# Altium PCB 音频带10W功放.pcbdoc
Units mm, origin at the board's own origin, x right, y up, seen from the top; angles counter-clockwise.
Board outline 144.9 x 109.39 mm, 2 copper layers (Top Layer, Bottom Layer); 103 components, 128 nets, 348 pads, 101 vias.
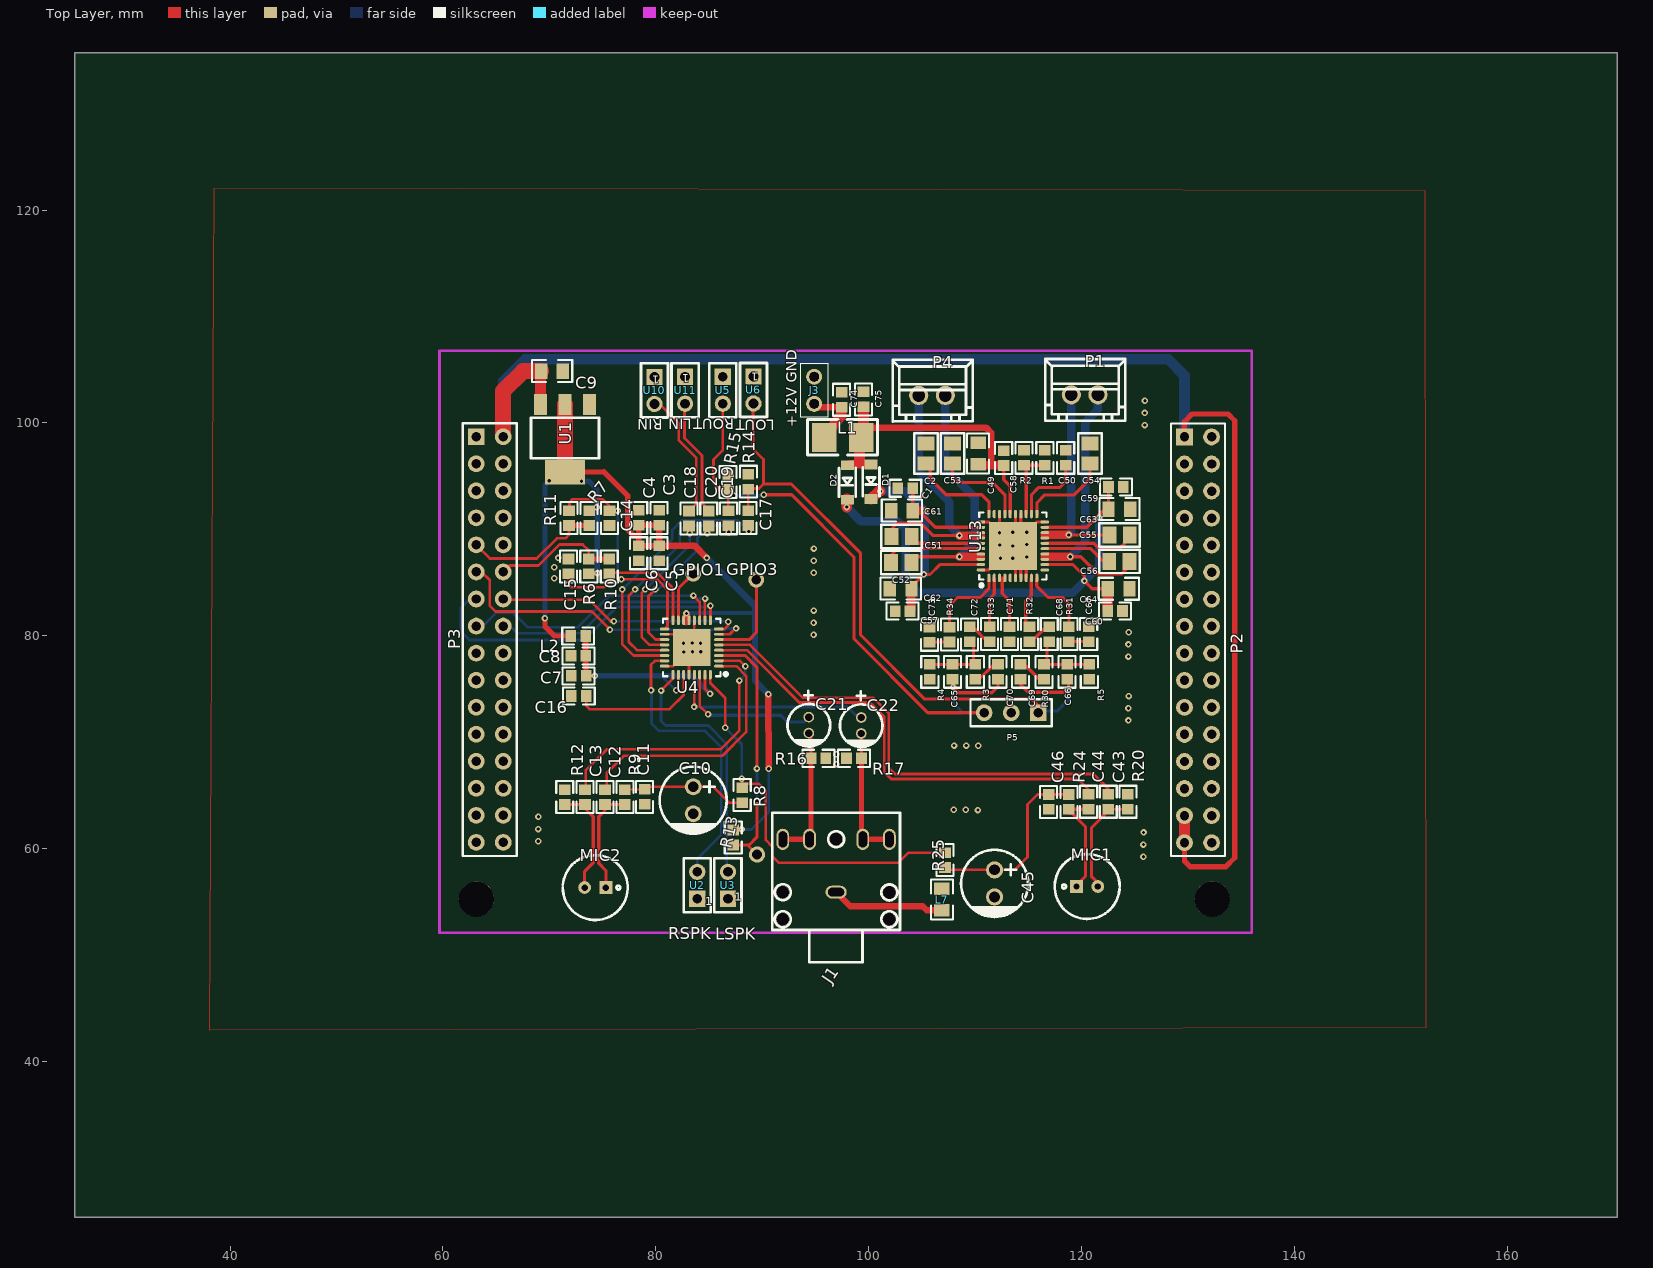
[diagram p0: Top Layer view]
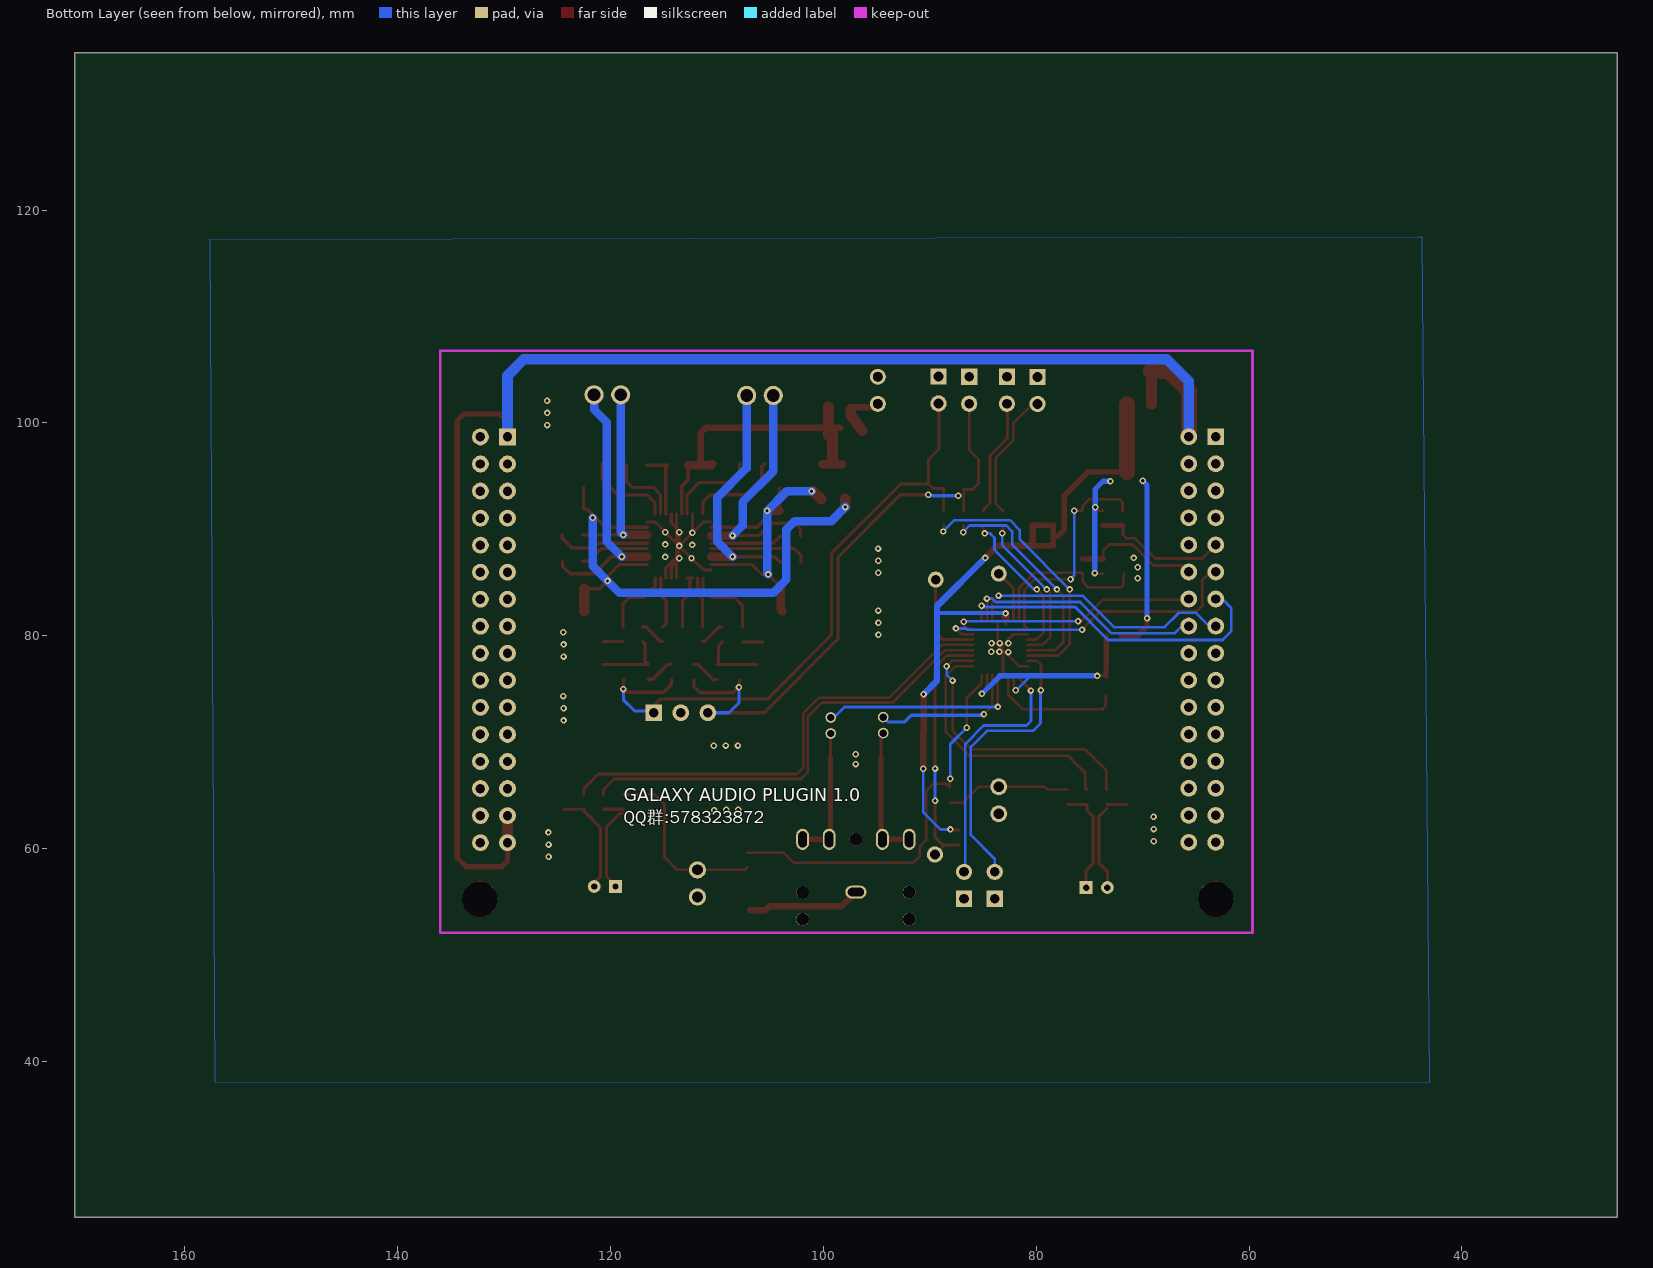
[diagram p1: Bottom Layer view, seen from below]

## Layer stack, top to bottom
Top Layer: signal copper (thickness not stored)
Dielectric: dielectric 0.32, FR-4, Dk 4.8
Bottom Layer: signal copper (thickness not stored)

## Board outline
170.3,25.4 25.4,25.4 25.4,134.787 170.3,134.787

## Components (designator, comment, footprint, x,y, rotation, side; value= is the part's Value field where it differs from the comment)
C1 "100nF" 0603 103.42,93.867 r180 top
C2 "1uF" C0805 105.38,97.127 r270 top
C3 "10uF" 0603 80.3,91.087 r270 top
C4 "100nF" 0603 78.38,91.087 r90 top
C5 "10uF" 0603 80.3,87.767 r90 top
C6 "100nF" 0603 78.38,87.767 r270 top
C7 "10uF" 0603 72.74,76.247 r0 top
C8 "100nF" 0603 72.72,78.127 r180 top
C9 "10uF" 0805 70.244,104.867 r180 top
C10 "47uF" CAP-TH_BD6.3-P2.50-D1.0-L-FD 83.5,64.567 r270 top
C11 "100nF" 0603 78.94,64.887 r270 top
C12 "1uF" 0603 75.22,64.866 r270 top
C13 "1uF" 0603 73.34,64.866 r270 top
C14 "33pF" 0603 75.64,91.067 r90 top
C15 "33pF" 0603 71.78,86.527 r270 top
C16 "4.7uF" 0603 72.76,74.367 r0 top
C17 "1uF" 0603 88.66,91.067 r90 top
C18 "1uF" 0603 83.1,91.027 r90 top
C19 "1uF" 0603 86.82,91.047 r90 top
C20 "1uF" 0603 84.96,91.027 r90 top
C21 "22uF" CAP-D4.0XF1.5 94.36,71.627 r0 top
C22 "22uF" CAP-D4.0XF1.5 99.28,71.587 r0 top
C43 "1uF" 0603 122.48,64.427 r270 top
C44 "1uF" 0603 120.62,64.427 r270 top
C45 "47uF" CAP-TH_BD6.3-P2.50-D1.0-L-FD 111.8,56.757 r270 top
C46 "100nF" 0603 116.88,64.407 r270 top
C49 "10uF" 0805 110.26,97.127 r270 top
C50 "220pF" 0603 118.48,96.727 r90 top
C51 "1uF" C0805 103.07,89.347 r180 top
C52 "1uF" C0805 103.04,86.887 r0 top
C53 "1uF" C0805 107.86,97.127 r270 top
C54 "1uF" C0805 120.76,97.127 r270 top
C55 "1uF" C0805 123.55,89.487 r0 top
C56 "1uF" C0805 123.53,87.007 r180 top
C57 "100nF" 0603 103.16,82.327 r180 top
C58 "100nF" 0603 112.66,96.707 r270 top
C59 "100nF" 0603 123.2,93.987 r180 top
C60 "100nF" 0603 123.12,82.347 r180 top
C61 "4.7uF" 0805 103.104,91.767 r0 top
C62 "4.7uF" 0805 102.98,84.447 r180 top
C63 "4.7uF" 0805 123.524,91.907 r180 top
C64 "4.7uF" 0805 123.464,84.427 r180 top
C65 "10uF" 0603 107.857,76.627 r90 top
C66 "10uF" 0603 118.62,76.627 r90 top
C67 "1uF" 0603 120.64,80.167 r270 top
C68 "1uF" 0603 116.94,80.167 r90 top
C69 "1uF" 0603 114.24,76.627 r90 top
C70 "1uF" 0603 112.131,76.627 r90 top
C71 "1uF" 0603 113.2,80.167 r90 top
C72 "1uF" 0603 109.46,80.147 r90 top
C73 "1uF" 0603 105.7,80.107 r270 top
C74 "100nF" 0603 97.44,102.177 r270 top
C75 "100nF" 0603 99.5,102.217 r270 top
D1 "1N5819HW-7-F" SOD-123 100.2,94.477 r90 top
D2 "1N5819HW-7-F" SOD-123 97.98,94.417 r90 top
GPIO1 "焊盘" 焊盘 83.5,85.847 r0 top
GPIO3 "焊盘" 焊盘 89.42,85.287 r0 top
J1 "PJ-307C" AUDIO-PJ307C 96.92,57.147 r180 top
J3 "2Pin" "2P  2.54MM" 94.86,103.067 r90 top
L1 "10uH" 1210 97.54,98.637 r0 top
L2 "0Ω" 0603 72.7,79.987 r0 top
L7 "100Ω" 0805 106.86,55.243 r270 top
MIC1 "GMI6050P-42DB" MIC-R6.0-2P-2.0PITCH 120.5,56.467 r0 top
MIC2 "GMI6050P-42DB" MIC-R6.0-2P-2.0PITCH 74.3,56.367 r180 top
P1 "XH-2A" XH-2A 120.26,102.647 r0 top
P2 "Header-Female-2.54_2x16" HDR-16X2/2.54 132.18,78.367 r270 top
P3 "Header-Female-2.54_2x16" HDR-16X2/2.54 65.66,78.387 r270 top
P4 "XH-2A" XH-2A 105.929,102.587 r0 top
P5 "Header-Male-2.54_1x3" HDR-3X1/2.54 113.36,72.787 r180 top
R1 "240KΩ" 0603 116.52,96.727 r90 top
R2 "240KΩ" 0603 114.56,96.727 r90 top
R3 "10KΩ(1002)" 0603 109.994,76.627 r270 top
R4 "10KΩ(1002)" 0603 105.72,76.627 r90 top
R5 "10KΩ(1002)" 0603 120.7,76.627 r270 top
R6 "4.7K" 0603 73.696,86.527 r270 top
R7 "4.7K" 0603 73.724,91.067 r90 top
R8 "680" 0603 88.1,65.047 r270 top
R9 "2.2K" 0603 77.08,64.866 r270 top
R10 "33" 0603 75.612,86.527 r270 top
R11 "33" 0603 71.84,91.067 r90 top
R12 "2.2K" 0603 71.44,64.867 r90 top
R13 "100K" 0603 87.26,61.067 r90 top
R14 "10K" 0603 88.68,94.486 r270 top
R15 "10K" 0603 86.78,94.447 r270 top
R16 "10K" 0603 95.26,68.507 r180 top
R17 "10K" 0603 98.6,68.507 r0 top
R20 "2.2K" 0603 124.32,64.427 r90 top
R24 "2.2K" 0603 118.78,64.407 r270 top
R25 "680" 0603 107.14,58.947 r270 top
R30 "10KΩ(1002)" 0603 116.44,76.627 r270 top
R31 "4.7KΩ(472)" 0603 118.78,80.167 r90 top
R32 "4.7KΩ(472)" 0603 115.08,80.167 r90 top
R33 "4.7KΩ(472)" 0603 111.34,80.167 r90 top
R34 "4.7KΩ(472)" 0603 107.58,80.127 r90 top
U1 "AMS1117-3.3" SOT-223 71.46,98.567 r270 top
U2 "RSPK" 2PIN 83.88,55.307 r180 top
U3 "LSPK" 2PIN 86.76,55.307 r180 top
U4 "NAU88C22YG" QFN-32_5X5X05P 83.36,78.907 r180 top
U5 "AUX-1" 2PIN 86.28,104.347 r0 top
U6 "AUX-2" 2PIN 89.16,104.367 r0 top
U10 "AUX-2" 2PIN 79.86,104.327 r0 top
U11 "AUX-1" 2PIN 82.74,104.347 r0 top
U13 "PAM8610TR" QFN-40_6X6X05P 113.52,88.447 r90 top

## Footprints (in the part's own frame and the unit in brackets; to place one, negate y for a bottom-side part, rotate by r counter-clockwise, add the part's x,y. Pads: shape width x height; smd on the part's side, far side on the other; paste and mask are expansions set on the pad)
"2P  2.54MM" [mm]
  round 1.5 hole 0.9 slot 0.9 at 0 deg: 1(-1.27,0) 2(1.27,0)
  silkscreen extent -2.54,-1.27 2.54,1.27
2PIN [mil]
  rect 60x60 hole 36: 1(0,0)
  round 60 hole 36: 2(0,-100)
  silkscreen extent -50,-150 50,50
0603 [mm]
  rect 1x1.1 smd: 1(-0.7,0) 2(0.7,0)
  silkscreen extent -1.5,-0.8 1.5,0.8
0805 [mm]
  rect 1.16x1.45 smd: 1(-1.016,0) 2(1.016,0)
  silkscreen extent -1.9,-1.03 1.87,1.04
1210 [mil]
  rect 90.56x106.3 smd: 1(-68,0) 2(68,0)
  silkscreen extent -130,-65 129,66
AUDIO-PJ307C [mm]
  round 1.2 hole 1.2: 0(-5,3.759) 0(-5,1.245) 0(0,-3.759) 0(5,3.759) 0(5,1.219)
  oval 2x1.2 hole 0.8 slot 1.5 at 0 deg: 1(0,1.205)
  oval 1.2x2 hole 0.8 slot 1.5 at 90 deg: 2(5.004,-3.748) 3(2.489,-3.748) 4(-2.511,-3.748) 5(-5.004,-3.748)
  silkscreen extent -6.01,-6.24 5.99,7.78
C0805 [mil]
  rect 51.2x63 smd: 1(-37.4,0) 2(37.4,0)
  silkscreen extent -75,-43 75,43
CAP-D4.0XF1.5 [mm]
  round 1 hole 0.7: 1(0,0.751) 2(0,-0.751)
  silkscreen extent -2,-2.02 2,3.23
CAP-TH_BD6.3-P2.50-D1.0-L-FD [mm]
  round 1.6 hole 1: 1(-1.27,0) 2(1.27,0)
  silkscreen extent -3.15,-3.15 3.17,3.15
HDR-3X1/2.54 [mil]
  rect 62x62 hole 35: 1(-100,0)
  round 62 hole 35: 2(0,0) 3(100,0)
  silkscreen extent -150,-50 150,50
HDR-16X2/2.54 [mil]
  rect 62x62 hole 35: 1(-800,-100)
  round 62 hole 35: 2(-800,0) 3(-700,-100) 4(-700,0) 5(-600,-100) 6(-600,0) 7(-500,-100) 8(-500,0) 9(-400,-100) 10(-400,0) 11(-300,-100) 12(-300,0) 13(-200,-100) 14(-200,0) 15(-100,-100) 16(-100,0) 17(0,-100) 18(0,0) 19(100,-100) 20(100,0) 21(200,-100) 22(200,0) 23(300,-100) 24(300,0) 25(400,-100) 26(400,0) 27(500,-100) 28(500,0) 29(600,-100) 30(600,0) 31(700,-100) 32(700,0)
  silkscreen extent -850,-150 750,50
MIC-R6.0-2P-2.0PITCH [mm]
  rect 1.2x1.2 hole 0.6: 1(-1,0)
  round 1.2 hole 0.6: 2(1,0)
  silkscreen extent -3.05,-3.05 3.05,3.05
QFN-32_5X5X05P [mm]
  oval 0.896x0.28 smd: 1(-2.55,1.75) 2(-2.55,1.25) 3(-2.55,0.749) 4(-2.55,0.249) 5(-2.55,-0.249) 6(-2.55,-0.749) 7(-2.55,-1.25) 8(-2.55,-1.75) 17(2.55,-1.75) 18(2.55,-1.25) 19(2.55,-0.749) 20(2.55,-0.249) 21(2.55,0.249) 22(2.55,0.749) 23(2.55,1.25) 24(2.55,1.75)
  oval 0.28x0.896 smd: 9(-1.75,-2.55) 10(-1.25,-2.55) 11(-0.749,-2.55) 12(-0.249,-2.55) 13(0.249,-2.55) 14(0.749,-2.55) 15(1.25,-2.55) 16(1.75,-2.55) 25(1.75,2.55) 26(1.25,2.55) 27(0.749,2.55) 28(0.249,2.55) 29(-0.249,2.55) 30(-0.749,2.55) 31(-1.25,2.55) 32(-1.75,2.55)
  rect 3.5x3.5 smd: 33(0,0)
  silkscreen extent -3.35,-2.7 2.7,2.7
QFN-40_6X6X05P [mm]
  rect 4.5x4.5 smd: 0(0,0)
  oval 0.796x0.28 smd: 1(-3,2.25) 2(-3,1.75) 3(-3,1.25) 4(-3,0.75) 5(-3,0.25) 6(-3,-0.25) 7(-3,-0.75) 8(-3,-1.25) 9(-3,-1.75) 10(-3,-2.25) 21(3,-2.25) 22(3,-1.75) 23(3,-1.25) 24(3,-0.75) 25(3,-0.25) 26(3,0.25) 27(3,0.75) 28(3,1.25) 29(3,1.75) 30(3,2.25)
  oval 0.28x0.796 smd: 11(-2.25,-3) 12(-1.75,-3) 13(-1.25,-3) 14(-0.75,-3) 15(-0.25,-3) 16(0.25,-3) 17(0.75,-3) 18(1.25,-3) 19(1.75,-3) 20(2.25,-3) 31(2.25,3) 32(1.75,3) 33(1.25,3) 34(0.75,3) 35(0.25,3) 36(-0.25,3) 37(-0.75,3) 38(-1.25,3) 39(-1.75,3) 40(-2.25,3)
  silkscreen extent -3.85,-3.15 3.15,3.15
SOD-123 [mil]
  rect 35.8x48 smd: 1(64,0) 2(-64,0)
  silkscreen extent -53,-31 53,31
SOT-223 [mm]
  rect 2x1.2 smd: 1(-3.175,2.3) 2(-3.175,0) 3(-3.175,-2.3)
  rect 2.3x3.8 smd: 4(3.175,0)
  silkscreen extent -1.93,-3.2 1.87,3.2
XH-2A [mm]
  round 1.8 hole 1.199: 1(-1.251,0) 2(1.251,0)
  silkscreen extent -3.69,-2.45 3.83,3.35
焊盘 [mm]
  round 1.5 hole 0.9: 1(0,0)

## Free pads (board coordinates)
  round 1.524 hole 0.914: 1(89.5,59.467)
  round 3.302 hole 3.302 unplated: ""(63.13,55.276) ""(132.24,55.276)

## Via types
v1: diameter 0.61, hole 0.305, Top Layer to Bottom Layer, 101 vias

## Nets (pads, with @x,y where several pads share a name; then routed paths per layer and width w, separated by ;. In a path a pad name is that pad's centre, name@x,y a point inside that pad or via, vN(x,y) a via of type N, cw(c..) or ccw(c..) an arc to the next point about the centre after c; other vN are vias at no path point)
3.3V: P2.3 P3.4
+5V: C9.2 P2.1 P2.29 P2.31 P3.2 U1.3 | length 145.6
  Top Layer w0.5: P2.31 129.64,58.847 130.16,58.327 133.52,58.327 134.36,59.167 134.36,100.207 133.72,100.847 130.36,100.847 129.62,100.107 129.62,98.707 P2.1
  Top Layer w1: U1.3 69.16,104.799 C9.2 ; P2.31 P2.29
  Top Layer w1.5: P3.2 65.659,103.007 67.521,104.866 C9.2
  Bottom Layer w1: P3.2 65.659,103.927 67.719,105.987 128.1,105.987 129.639,104.447 P2.1
+12V: C74.2 J3.1 L1.1 | length 5.1
  Top Layer w0.6: J3.1 95.18,101.477 C74.2
  Top Layer w1: L1.1@96.325,99.282 97.42,100.771 C74.2@97.42,101.301
AUXOUT1: C19.1 U4.21 | length 21.7
  Top Layer w0.25: v1(78.04,84.367) 77.46,83.787 77.46,79.407 78.2,78.667 U4.21 ; C19.1@86.821,90.345 v1(86.841,89.746)
  Bottom Layer w0.254: v1(78.04,84.367) 82.241,88.567 82.241,89.827 82.779,90.366 86.239,90.366 v1(86.841,89.746)
AUXOUT2: C17.1 U4.22 | length 25.7
  Top Layer w0.25: v1(76.84,84.367) 76.84,79.207 77.888,78.158 U4.22 ; C17.1 88.66,89.867 v1(88.72,89.807)
  Bottom Layer w0.25: v1(76.84,84.367) 81.54,89.086 81.54,89.947 82.459,90.866 87.659,90.866 v1(88.72,89.807)
AVCC12: C49.2 C58.2 C75.2 D1.1 D2.1 L1.2 U13.26 | length 31.4
  Top Layer w0.3: C58.2 112.66,94.677 113.27,94.067 U13.26
  Top Layer w0.6: L1.2@98.4,99.567 111,99.567 111.5,99.067 111.5,96.11 ; L1.2@99.5,99.397 L1.2@99.62,99.517
  Top Layer w0.8: D2.1@98.18,96.137 D1.1@100.04,96.137 ; C49.2@110.42,96.113 110.526,96.007 C58.2
  Top Layer w1: 99.12,96.497 99.119,99.015 L1.2@99.5,99.396 ; L1.2@99.267,98.637 99.5,98.87 C75.2
AVDD: C71.2 U13.3 U13.4 | length 5.4
  Top Layer w0.3: U13.3 U13.4 ; 112.519,85.446 112.519,83.988 113.2,83.307 C71.2
C2_2: C2.2 U13.30 | length 9.1
  Top Layer w0.3: C2.2@105.483,96.177 105.76,95.9 105.76,94.767 107.259,93.266 110.599,93.266 111.27,92.596 U13.30
C11_1: C10.1 C11.1 R8.2 R9.1 | length 11.7
  Top Layer w0.25: R9.1 C11.1@78.939,65.585 ; C11.1 79.19,65.837 C10.1@83.22,65.837 ; C10.1@83.219,65.837 85.37,65.837 86.859,64.346 R8.2
C13_2: C13.2 MIC2.2 R12.1 | length 10
  Top Layer w0.3: R12.1 C13.2 ; MIC2.2 73.3,57.887 74.121,58.707 74.121,63.01 C13.2@73.341,63.79
C21_2: C21.2 J1.2 J1.3 R16.2 | length 12.6
  Top Layer w0.3: C21.2 94.56,70.676 R16.2
  Top Layer w0.5: J1.2 J1.3 94.56,61.024 R16.2
C22_2: C22.2 J1.4 J1.5 R17.2 | length 12.9
  Top Layer w0.3: C22.2 99.3,70.816 R17.2 ; R17.2@99.299,68.054 99.319,67.686
  Top Layer w0.5: R17.2 99.3,61.026 J1.4 J1.5
C44_2: C44.2 MIC1.1 R24.2 | length 9.9
  Top Layer w0.3: R24.2@118.779,63.327 119.079,63.327 120.341,62.068 120.341,57.447 119.5,56.607 MIC1.1 ; R24.2 118.8,63.727 C44.2
C50_1: C50.1 U13.22 | length 7.1
  Top Layer w0.3: U13.22 115.27,93.276 115.92,93.927 117.899,93.927 118.481,94.506 C50.1
C51_1: C51.1 U13.35 | length 6.8
  Top Layer w0.3: C51.1 104.67,88.697 U13.35
C52_1: C52.1 U13.36 | length 9.4
  Top Layer w0.3: C52.1 102.09,87.597 102.689,88.196 U13.36
C53_2: C53.2 U13.27 | length 8.8
  Top Layer w0.3: C53.2@107.841,96.246 107.841,94.887 108.321,94.407 111.64,94.407 112.771,93.276 U13.27
C54_2: C54.2 U13.21 | length 8.4
  Top Layer w0.3: U13.21 115.801,91.476 115.801,92.527 116.52,93.246 119.301,93.246 120.759,94.706 C54.2
C55_2: C55.2 U13.16 | length 8.9
  Top Layer w0.3: U13.16 121.099,88.707 121.539,88.268 123.599,88.268 124.5,89.167 C55.2
C56_2: C56.2 U13.15 | length 6.6
  Top Layer w0.3: U13.15 120.83,88.197 122.02,87.007 C56.2
GND: C1.2 C2.1 C3.1 C4.2 C5.1 C6.2 C7.1 C8.2 C9.1 C10.2 C11.2 C14.1 C15.1 C16.1 C45.2 C46.2 C49.1 C50.2 C53.1 C54.1 C57.2 C58.1 C59.1 C60.1 C61.1 C62.2 C63.1 C64.1 C67.1 C71.1 C73.1 C74.1 C75.1 J3.2 L7.1 P2.2 P2.4 P2.32 P3.1 P3.31 P5.2 R1.2 R2.2 R4.1 R5.2 R12.2 R14.1 R15.1 R16.1 R17.1 R20.2 U1.1 U2.1 U3.1 U4.12 U4.18 U4.24 U4.28 U4.33 U5.1 U6.1 U10.1 U11.1 U13.0 U13.6 U13.7 U13.8 U13.11 U13.20 U13.24 U13.25 U13.28 U13.31 U13.40 | length 43.3
  Top Layer w0.25: U4.24 81.61,77.157 U4.33 ; U4.18 82.11,80.156 U4.33 ; U4.28 83.111,78.658 U4.33 ; U4.12 83.609,79.156 U4.33
  Top Layer w0.3: U13.40 111.27,86.197 v1(112.36,87.287) U13.0 ; U13.31 111.27,90.697 U13.0 ; U13.28 v1(112.27,89.697) U13.0 ; U13.6 113.77,88.197 U13.0 ; U13.25 113.77,88.697 U13.0 ; U13.7 114.269,86.538 v1(113.52,87.287) U13.0 ; U13.24 114.269,90.617 113.52,89.868 v1(113.52,89.727) U13.0 ; U13.8 114.77,86.378 113.52,87.627 U13.0 ; U13.20 115.77,90.697 v1(114.82,89.747) U13.0
  other v1: 125.78,59.267 125.78,60.407 68.94,60.727 125.8,61.546 68.94,61.867 68.96,63.006 110.24,63.647 107.96,63.667 109.1,63.667 96.94,67.967 96.94,68.887 108,69.707 109.14,69.707 110.28,69.687 124.38,72.067 124.38,73.206 124.4,74.346 124.38,78.067 82.62,78.486 83.44,78.507 84.22,78.507 124.38,79.206 82.6,79.306 84.18,79.306 83.42,79.326 94.8,80.107 124.4,80.347 94.8,81.246 94.82,82.387 70.44,85.427 94.82,85.927 70.46,86.447 94.82,87.067 70.82,87.326 114.83,87.417 94.84,88.207 113.52,88.447 112.28,88.547 114.83,88.597 125.9,99.806 125.9,100.946 125.92,102.086
GPIO1: GPIO1.1 U4.15 | length 5
  Top Layer w0.3: U4.15 82.11,84.457 GPIO1.1
GPIO2: pad.1 R13.1 U4.3 | length 23.9
  Top Layer w0.254: 88.475,60.367 88.6,60.367 pad.1
  Top Layer w0.3: U4.3 88.389,78.157 89.48,77.067 v1(89.48,67.546) ; R13.1 88.74,60.348 89.479,61.087 v1(89.48,64.527)
  Bottom Layer w0.3: v1(89.48,64.527) 89.48,64.539 v1(89.48,64.527) v1(89.48,67.546)
GPIO3: GPIO3.1 U4.6 | length 8.7
  Top Layer w0.3: U4.6 88.769,79.657 89.44,80.328 GPIO3.1@89.44,85.207
I2S_BCLK: P3.14 U4.8 | length 23.4
  Top Layer w0.254: P3.14 65.721,83.406 73.699,83.406 75.721,81.387 v1(76.06,81.386) ; U4.8@85.871,80.658 86.432,80.658 86.8,81.026 v1(86.8,81.326)
  Bottom Layer w0.254: v1(76.06,81.386) 86.74,81.387 v1(86.8,81.326)
I2S_DI: P3.13 U4.9 | length 30.5
  Top Layer w0.25: U4.9 85.12,81.467 v1(85.12,82.827)
  Bottom Layer w0.254: P3.13 62.5,83.467 61.68,82.647 61.68,80.427 62.48,79.627 73.239,79.627 76.32,82.708 84.999,82.708 v1@85.119,82.827
I2S_DO: P3.16 U4.10 | length 22.7
  Top Layer w0.25: U4.10 84.58,81.486 84.58,83.467 v1(84.62,83.507)
  Bottom Layer w0.254: P3.16 66.3,80.927 66.981,80.246 72.919,80.246 75.86,83.188 83.8,83.188 84.12,83.508 v1(84.62,83.507)
I2S_I2C_SCL: C15.2 R10.2 U4.16 | length 15.6
  Top Layer w0.254: C15.2@71.779,85.827 71.799,84.788 72.02,84.567 75.101,84.567 75.612,85.077 R10.2 75.711,85.926 80.161,85.926 81.611,84.475 U4.16
I2S_I2C_SDA: C14.2 R11.2 U4.17 | length 21.3
  Top Layer w0.25: v1(76.76,85.326) 80.08,85.327 81.08,84.327 81.08,80.927 U4.17
  Top Layer w0.254: R11.2 71.88,91.807 71.88,92.547 72.18,92.847 75,92.847 75.64,92.206 75.64,91.766 v1@76.42,91.766
  Bottom Layer w0.254: v1(76.42,91.767) 76.42,85.666 v1(76.76,85.326)
I2S_LRCK: P3.11 U4.7 | length 29.9
  Top Layer w0.254: P3.11 63.62,86.007 64.4,85.227 64.4,82.827 64.941,82.286 73.981,82.286 v1(75.68,80.587) ; U4.7 86.93,80.157 87.479,80.707 v1(87.52,80.706)
  Bottom Layer w0.254: v1(75.68,80.587) 86.46,80.587 86.58,80.707 v1(87.52,80.706)
I2S_MCLK: P3.15 U4.11 | length 25.3
  Top Layer w0.25: v1(83.52,83.786) 84.109,83.197 U4.11
  Bottom Layer w0.254: P3.15 63.74,80.927 64.979,82.167 66.6,82.167 67.941,80.825 72.678,80.825 75.639,83.787 v1(83.52,83.786)
L7_2: J1.1 L7.2 | length 10.7
  Top Layer w0.6: J1.1 98.255,54.607 105.04,54.607 105.42,54.227 L7.2
L+: C55.1 P1.1 U13.17 U13.18 | length 19.9
  Top Layer w0.3: U13.17 U13.18 ; v1(118.76,89.487) C55.1
  Top Layer w0.8: 116.52,89.461 116.546,89.487 v1(118.76,89.487)
  Bottom Layer w0.8: v1(118.76,89.487) 119.009,89.736 P1.1
L-: C56.1 P1.2 U13.13 U13.14 | length 26.2
  Top Layer w0.3: U13.13 U13.14 ; v1(118.9,87.427) 119.9,87.427 121.48,85.847 123.759,85.847 124.48,86.566 C56.1
  Top Layer w0.8: 116.52,87.422 116.789,87.427 v1(118.9,87.427)
  Bottom Layer w0.8: v1(118.9,87.427) 120.299,88.826 120.299,100.045 121.511,101.257 P1.2
L_IN: C17.2 C66.1 C69.1 P5.1 R14.2 U6.2 | length 62.4
  Top Layer w0.25: C17.2 R14.2 88.741,93.845 89.681,93.845 90.1,94.267 90.1,96.586 89.119,97.567 U6.2@89.119,102.306
  Top Layer w0.3: 90.099,94.267 92.7,94.267 99.22,87.747 99.22,80.086 105.24,74.066 115.28,74.066 115.9,73.447 P5.1 ; C69.1 114.259,75.428 114.98,74.706 118.44,74.706 v1(118.76,75.007) 118.76,75.767 118.68,75.847 C66.1@118.78,75.847
  Bottom Layer w0.3: P5.1 116.06,72.947 117.7,72.947 118.76,74.007 v1(118.76,75.007)
LAUXI: C20.2 U11.2 | length 11.5
  Top Layer w0.25: U11.2@82.68,102.327 82.68,98.567 84.319,96.927 84.319,92.466 84.961,91.826 C20.2
LAUXIN: C20.1 U4.19 | length 14.7
  Top Layer w0.25: v1(79.94,84.367) 79.3,83.727 79.3,80.327 79.97,79.657 U4.19 ; v1(84.82,89.626) 84.96,89.767 C20.1
  Bottom Layer w0.25: v1(79.94,84.367) 80.18,84.367 83.9,88.087 83.9,89.207 84.32,89.627 v1@84.96,89.627
LHP: C21.1 U4.30 | length 14
  Top Layer w0.25: U4.30 84.11,73.436 v1(84.9,72.647)
  Bottom Layer w0.3: v1(84.9,72.647) 85.001,72.547 91.719,72.547 92.339,71.928 93.901,71.928 C21.1@94.351,72.377
LSPKOUT: U3.2 U4.25 | length 23.9
  Top Layer w0.25: v1(80.48,74.866) 81.61,75.997 U4.25
  Bottom Layer w0.25: v1(80.48,74.866) 80.481,72.027 80.92,71.587 84.921,71.587 86.64,69.868 86.64,57.965 U3.2
MICBIAS: R8.1 R25.1 U4.32 | length 37.7
  Top Layer w0.25: U4.32 85.111,75.555 86.52,74.146 v1(86.52,71.367) ; v1(88.06,66.587) 88.1,66.547 R8.1 ; R8.1 88.458,66.106 89.662,66.106 90.32,65.448 90.32,60.828 90.919,60.228 90.919,59.347 91.579,58.687 102.738,58.687 103.698,59.647 R25.1
  Bottom Layer w0.25: v1(86.52,71.367) 88.06,69.826 v1(88.06,66.587)
MICN: C13.1 U4.2 | length 26.8
  Top Layer w0.25: C13.1 73.4,65.626 73.4,67.367 75.38,69.347 86.06,69.347 87.84,71.127 v1(87.84,75.807) ; U4.2 87.9,77.666 v1(88.4,77.147)
  Bottom Layer w0.25: v1(87.84,75.807) 88.4,76.367 v1(88.4,77.147)
MICP: C12.1 U4.1 | length 24.5
  Top Layer w0.25: C12.1 75.38,65.727 75.38,67.127 77,68.747 86.26,68.747 88.48,70.967 88.48,76.227 87.55,77.157 U4.1
OTH3.3V: C3.2 C4.1 C5.2 C6.1 L2.1 R6.2 R7.2 R13.2 U1.2 U1.4 U4.13 U4.14 | length 98
  Top Layer w0.25: U4.14 U4.13 ; 82.86,81.087 82.86,81.459 v1(82.86,82.106)
  Top Layer w0.254: R6.2 74.4,85.827 v1@74.48,85.907 ; R7.2@73.724,91.766 74.12,91.766 v1@74.44,92.087
  Top Layer w0.3: U4.14 82.611,81.857 v1(82.86,82.106) 83.111,81.855 U4.13 ; R13.2 v1@87.98,61.767 ; v1@87.98,61.767 v1(88.04,61.827) v1@87.98,61.767
  Top Layer w0.5: v1@69.579,81.666 69.579,80.866 70.46,79.987 L2.1 ; U1.4@71.459,95.392 75.119,95.408 77.339,93.188 77.339,89.987 77.928,89.4 78.38,89.4 ; C6.1 C5.2 ; C6.1 C4.1 ; C4.1 C3.2
  Top Layer w0.6: C3.2 C5.2 83.62,88.486 v1(84.78,87.326) ; v1@90.559,74.547 v1@90.6,67.546
  Top Layer w1.5: U1.4 U1.2
  Bottom Layer w0.25: v1(88.04,61.827) 88.96,61.827 90.6,63.466 v1(90.6,67.526)
  Bottom Layer w0.4: v1(82.86,82.106) 82.881,82.128 89.22,82.147
  Bottom Layer w0.5: v1(69.58,81.667) 69.58,94.167 v1(69.98,94.566) ; v1(73.02,94.526) 73.7,94.527 74.44,93.787 74.44,92.087 74.48,92.047 v1@74.48,85.907
  Bottom Layer w0.6: v1@84.78,87.327 89.3,82.807 89.3,75.786 v1@90.56,74.526
  other v1: 90.56,74.526 74.48,85.907 74.44,92.086
PA0: P3.9 R7.1 R11.1 | length 12.9
  Top Layer w0.254: P3.9 64.4,87.267 68.799,87.267 70.699,89.167 71.499,89.167 71.84,89.507 R11.1
  Top Layer w0.5: R11.1 R7.1
PA1: P3.12 R6.1 R10.1 | length 12
  Top Layer w0.254: P3.12 66.259,86.606 68.959,86.606 70.94,88.588 73.12,88.588 73.696,88.011 R6.1
  Top Layer w0.5: R6.1 R10.1
PA7: P3.18
PA8: P3.17
PA9: P3.20
PA10: P3.19
PA11: P3.22
PA12: P3.21
PB0: P3.32
PB1: P2.26
PB2: P2.24
PB3: P2.23
PB5: P2.25
PB7: P2.28
PB8: P2.27
PB13: P2.10
PC0: P2.30
PD8: P2.21
PD9: P2.22
PD10: P2.19
PD11: P2.20
PD12: P2.17
PD13: P2.18
PD14: P2.15
PD15: P2.16
PE10: P3.8
PE12: P3.10
PF7: P2.8
PF8: P2.7
PF9: P2.6
PF10: P2.5
PG0: P3.29
PG1: P3.30
PG3: P3.27
PG5: P3.28
PG6: P3.25
PG7: P3.26
PG8: P3.23
PG9: P3.24
PG11: P2.13
PG12: P2.14
PG13: P2.11
PG14: P2.12
PG15: P2.9
PVCCL: C59.2 C60.2 C63.2 C64.2 D2.2 U13.12 U13.19 | length 54.2
  Top Layer w0.3: U13.12 119.169,86.698 120.241,85.626 v1@120.241,85.166 ; U13.19 120.459,90.206 122.16,91.907 C63.2 122.5,91.915 C59.2 ; v1(120.24,85.167) 120.98,84.427 C64.2
  Top Layer w1: v1@97.919,92.108 D2.2@97.919,92.852 ; C60.2 122.448,82.375 C64.2
  Bottom Layer w0.8: v1@97.919,92.108 99.24,90.767 102.679,90.767 103.439,90.007 103.439,85.286 104.681,84.046 119.121,84.046 120.241,85.166 121.64,86.566 v1(121.635,91.107)
  other v1: 97.92,92.107
PVCCR: C1.1 C57.1 C61.2 C62.1 D1.2 U13.32 U13.39 | length 32.1
  Top Layer w0.3: C62.1@103.996,84.507 103.996,84.609 v1(105.159,85.772) 105.74,85.766 106.67,86.698 U13.39 ; C61.2 C1.1 ; C61.2 104.681,91.768 106.25,90.198 U13.32
  Top Layer w0.8: C57.1 103.996,82.463 C62.1 ; C61.2 v1(105.26,91.747)
  Top Layer w1: D1.2 100.936,93.587 v1(101.08,93.587)
  Bottom Layer w0.8: v1(101.08,93.587) 103.42,93.587 v1(105.26,91.747) 105.26,85.873 v1(105.159,85.772)
PVDD: U13.29
R1_1: R1.1 R2.1 U13.23 | length 6.6
  Top Layer w0.3: U13.23 114.77,95.817 R2.1 R1.1
R3_1: C65.2 C72.1 R3.1 R4.2 | length 6.6
  Top Layer w0.3: R4.2@106.23,77.307 C65.2@108.367,77.307 ; C65.2@107.856,77.307 109.994,77.307 109.819,77.48 109.819,79.085 C72.1@109.461,79.446
R3_2: C70.2 R3.2 | length 2.7
  Top Layer w0.3: R3.2@109.994,75.907 110.32,75.907 111.72,77.306 C70.2@112.131,77.306
R5_1: C66.2 C68.1 R5.1 R30.1 | length 6.6
  Top Layer w0.3: R30.1 116.741,77.627 116.741,79.266 C68.1 ; R30.1 C66.2 ; C66.2 R5.1
R9_2: C12.2 MIC2.1 R9.2 | length 10.2
  Top Layer w0.25: C12.2 R9.2
  Top Layer w0.3: C12.2 75.22,63.607 74.621,63.007 74.621,58.646 75.299,57.968 MIC2.1@75.299,56.368
R20_1: C43.2 MIC1.2 R20.1 | length 10
  Top Layer w0.25: C43.2 124.26,63.727 R20.1@124.301,63.686
  Top Layer w0.3: MIC1.2@121.499,56.467 121.499,56.807 120.92,57.386 120.92,62.007 122.48,63.566 C43.2
R24_1: C45.1 C46.1 R24.1 R25.2 | length 17.6
  Top Layer w0.25: R25.2 107.36,58.027 C45.1 113.699,58.026 114.9,59.228 114.9,64.166 115.84,65.105 C46.1@116.879,65.105 ; C46.1 R24.1
R30_2: C69.2 R30.2 | length 2.8
  Top Layer w0.3: C69.2 114.6,77.327 116,75.927 R30.2
R31_1: C67.2 R31.1 | length 1.9
  Top Layer w0.3: R31.1 C67.2
R31_2: R31.2 U13.10 | length 6.6
  Top Layer w0.3: U13.10 115.77,84.676 116.84,83.607 118.199,83.607 118.78,83.027 R31.2
R32_1: C68.2 R32.1 | length 2.4
  Top Layer w0.3: R32.1 115.26,79.467 116.66,80.867 C68.2
R32_2: R32.2 U13.9 | length 4.9
  Top Layer w0.3: R32.2 114.739,81.206 114.739,83.287 115.24,83.787 115.24,85.415 U13.9
R33_1: C72.2 R33.1 | length 2.5
  Top Layer w0.3: C72.2 109.76,80.847 111.14,79.467 R33.1
R33_2: R33.2 U13.2 | length 4.8
  Top Layer w0.3: R33.2 111.341,83.508 111.77,83.937 U13.2
R34_1: C73.2 R34.1 | length 1.9
  Top Layer w0.3: C73.2 R34.1
R34_2: R34.2 U13.1 | length 7.4
  Top Layer w0.3: R34.2 107.579,82.867 108.321,83.607 110.439,83.607 111.27,84.437 U13.1
R+: C51.2 P4.1 U13.33 U13.34 | length 25.1
  Top Layer w0.3: C51.2 102.12,90.046 102.659,90.587 104.879,90.587 106.042,89.423 v1@108.501,89.423 ; U13.34 U13.33
  Top Layer w0.8: v1(108.5,89.423) 110.52,89.424
  Bottom Layer w0.8: P4.1 104.678,95.448 107.56,92.567 107.56,90.364 v1(108.5,89.423)
R-: C52.2 P4.2 U13.37 U13.38 | length 25.4
  Top Layer w0.3: C52.2 104.53,87.427 v1(108.5,87.427) 110.218,87.427
  Top Layer w0.8: v1@108.481,87.427 110.52,87.427
  Bottom Layer w0.8: P4.2@107.18,102.588 107.18,95.766 109.939,93.007 109.939,88.867 v1@108.501,87.427
R_IN: C19.2 C65.1 C70.1 P5.3 R15.2 U5.2 | length 59.6
  Top Layer w0.25: U5.2@86.279,102.327 86.279,97.447 85.401,96.566 85.401,94.308 85.959,93.746 R15.2 86.78,91.787 C19.2
  Top Layer w0.3: R15.2@87.157,93.31 v1(87.3,93.167) ; v1(90.12,93.267) 92.74,93.266 98.6,87.406 98.6,79.725 105.539,72.786 P5.3 ; C65.1@107.857,75.907 107.857,75.23 v1(107.9,75.187) 108.42,74.666 111.539,74.666 112.131,75.258 C70.1@112.131,75.908
  Bottom Layer w0.3: v1(87.3,93.167) 90.02,93.167 v1(90.12,93.267) ; v1(107.9,75.187) 107.899,73.726 108.839,72.786 P5.3
RAUXI: C18.2 U10.2 | length 12.5
  Top Layer w0.25: U10.2@79.861,102.327 79.861,102.266 82.139,99.987 82.139,98.387 83.8,96.726 83.8,92.426 C18.2@83.099,91.727
RAUXIN: C18.1 U4.20 | length 14.8
  Top Layer w0.25: v1(79,84.367) 78.66,84.027 78.66,79.907 79.41,79.157 U4.20 ; C18.1@83.1,90.327 83.1,89.727 v1(83.18,89.646)
  Bottom Layer w0.25: v1(79,84.367) 83.18,88.547 v1(83.18,89.646)
RHP: C22.1 U4.29 | length 18.9
  Top Layer w0.25: v1(83.58,73.327) 83.61,73.357 U4.29
  Bottom Layer w0.3: v1@83.58,73.327 97.991,73.327 C22.1@98.98,72.337
RMICN: C43.1 U4.5 | length 45.7
  Top Layer w0.25: U4.5 88.831,79.157 93.782,74.206 100.401,74.206 101.879,72.728 101.879,67.607 102.461,67.025 121.099,67.025 122.479,65.646 C43.1
RMICP: C44.1 U4.4 | length 43.6
  Top Layer w0.25: U4.4 88.549,78.659 93.459,73.746 100.101,73.746 101.44,72.408 101.44,67.226 102.1,66.566 119.621,66.566 120.619,65.568 C44.1
RSPKOUT: U2.2 U4.23 | length 27.1
  Top Layer w0.25: v1(79.54,74.887) 79.54,77.307 79.89,77.657 U4.23
  Bottom Layer w0.25: v1(79.54,74.887) 79.579,74.846 79.579,71.788 80.28,71.087 84.621,71.087 86.119,69.586 86.119,61.288 83.879,59.047 U2.2@83.879,57.846
S$21: 
S$23: 
S$67: 
S$69: 
S$2331: 
SP_VD33: C7.2 C8.1 L2.2 U4.26 U4.31 | length 22.3
  Top Layer w0.25: C7.2 v1(74.26,76.246) ; v1(81.9,74.887) 82.11,75.097 U4.26 ; U4.31 84.61,75.037 v1(85.08,74.567)
  Top Layer w0.5: L2.2 73.4,78.147 C8.1@73.44,78.107 ; C8.1@73.419,78.125 C7.2
  Bottom Layer w0.25: 79.851,76.247 80.54,76.247 v1(81.9,74.887)
  Bottom Layer w0.5: v1(74.26,76.246) 83.4,76.247 v1(85.08,74.567)
U4_27: C16.2 U4.27 | length 12.7
  Top Layer w0.25: C16.2 73.46,73.426 73.76,73.127 81.281,73.127 82.612,74.458 U4.27
undefined: 
USB0_DM: P3.6
USB0_DP: P3.3
USB1_DM: P3.7
USB1_DP: P3.5
VOLUME: U13.5
pads on no net: J1.0

## Polygon pours and split planes (outlines as drawn)
GND on Bottom Layer (solid): 44.05,117.437 157.6,117.187 157.15,38.137 43.039,38.1 43.75,117.437
GND on Top Layer (solid): 38.5,122.087 152.188,121.85 152.3,43.187 38.1,42.987 38.5,122.087

## Silkscreen, mask and mechanical layers (free items; w line width, h text height)
Top Overlay:
  text "LIN" at 83.343,100.379 h1 r180
  text "ROUT" at 87.376,100.378 h1 r180
  text "RIN" at 80.632,100.336 h1 r180
  text "LOUT" at 91.164,100.319 h1 r180
  text "+12V GND" at 93.206,99.603 h1 r90
Bottom Overlay:
  text "GALAXY AUDIO PLUGIN 1.0 / QQ群:578323872" at 118.74,62.006 h2.03

## Text inside footprints (layer, text, board x,y; h text height)
U2: Top Overlay "1" at 84.612,54.713 h0.76
U3: Top Overlay "1" at 87.393,55.113 h0.76
U5: Top Overlay "。" at 86.507,95.599 h0.76 r248
U6: Top Overlay "1" at 89.62,104.711 h0.76 r180
U10: Top Overlay "1" at 80.32,104.431 h0.76 r180
U11: Top Overlay "1" at 83.14,104.571 h0.76 r180